# Altium PCB TEENSY 2.PcbDoc
Units mil, origin at the board's own origin, x right, y up, seen from the top; angles counter-clockwise.
Board outline 3700 x 3900 mil, 2 copper layers (Top Layer, Bottom Layer); 4 components, 15 nets, 84 pads, 0 vias.
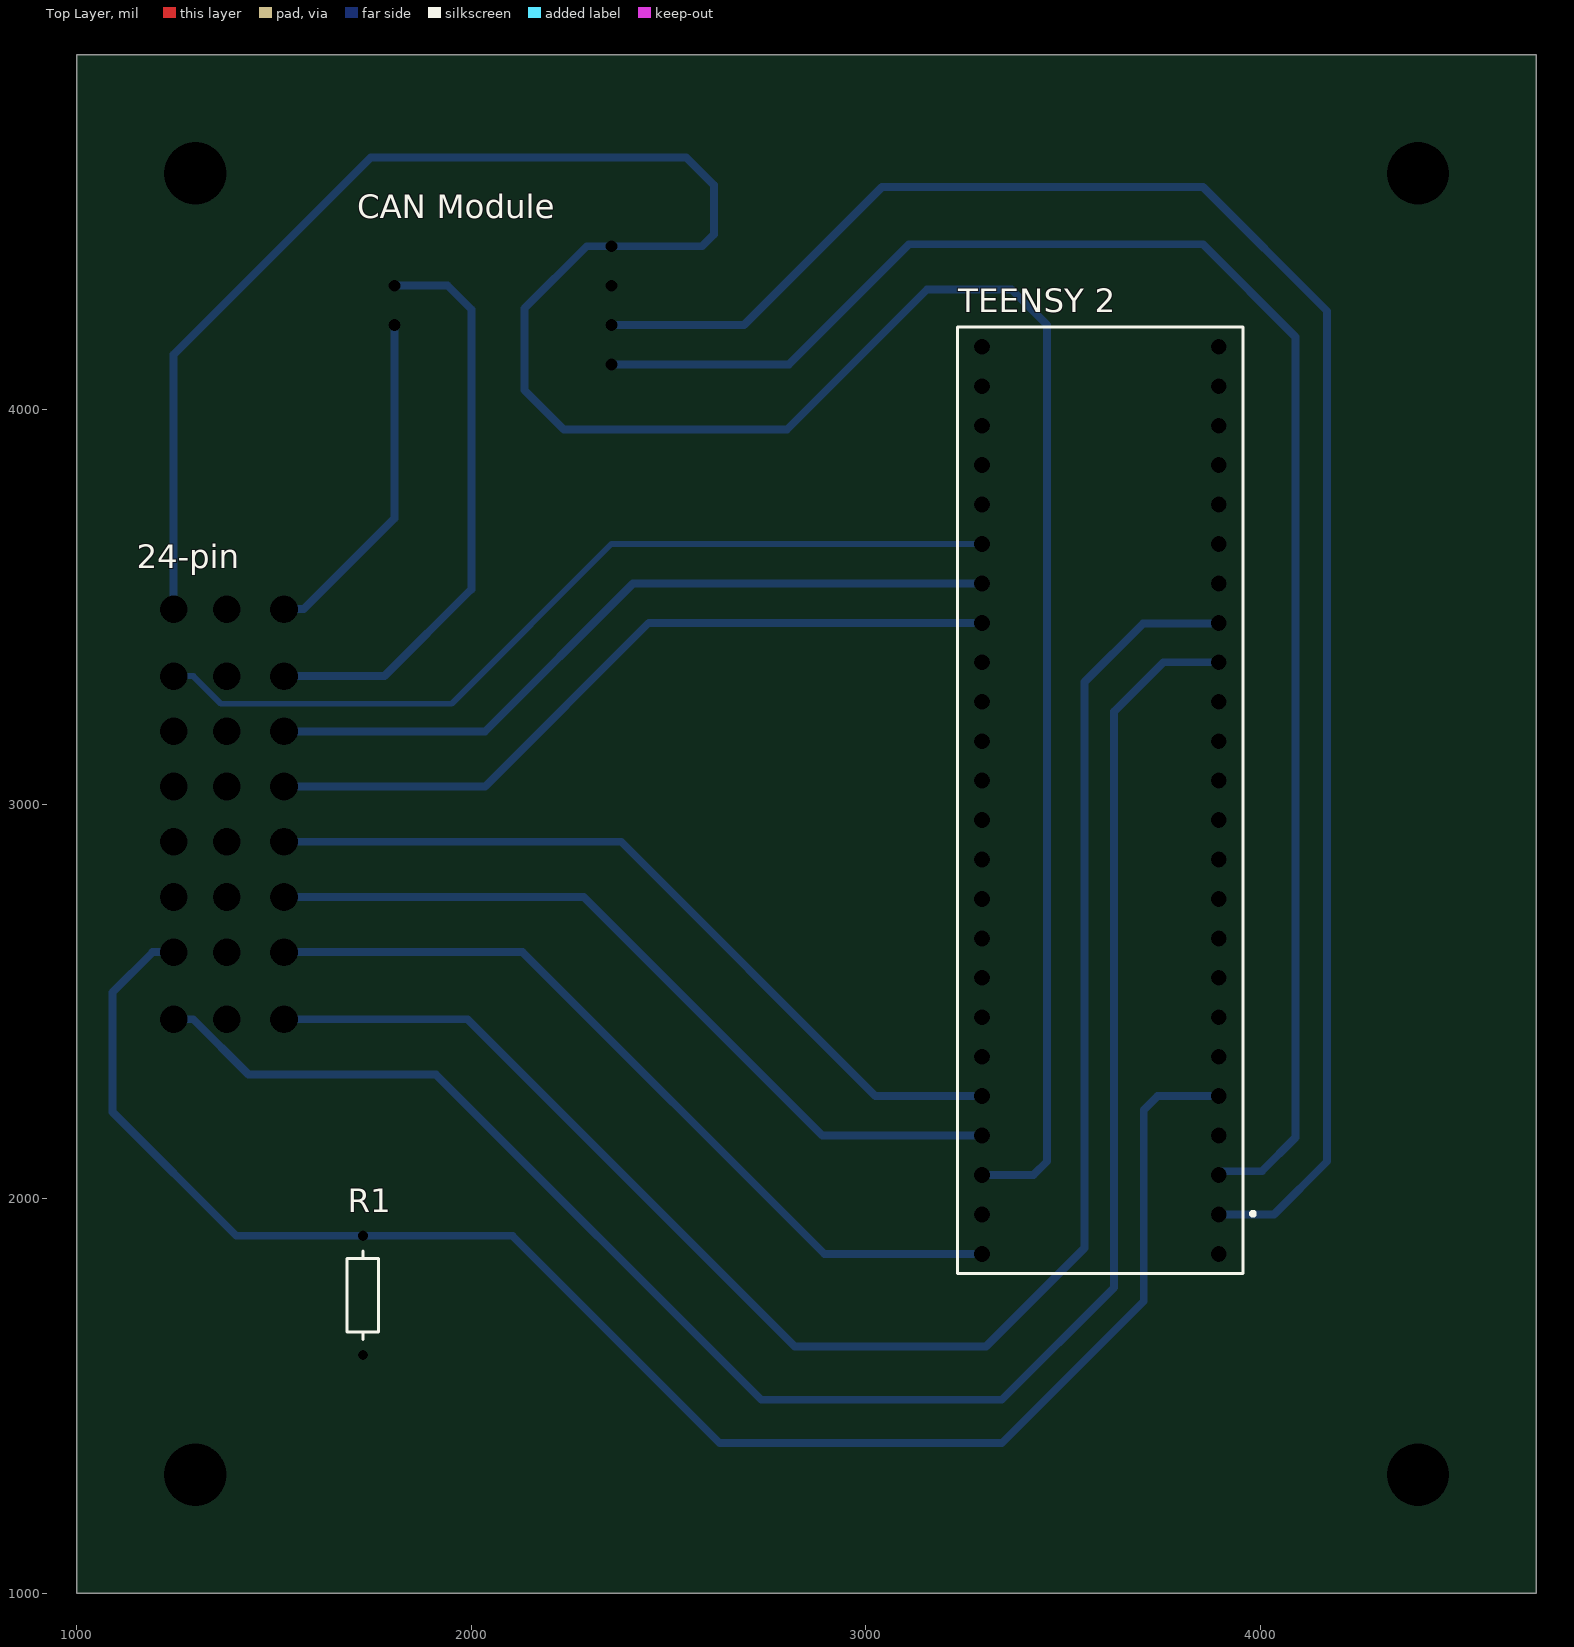
[diagram p0: Top Layer view]
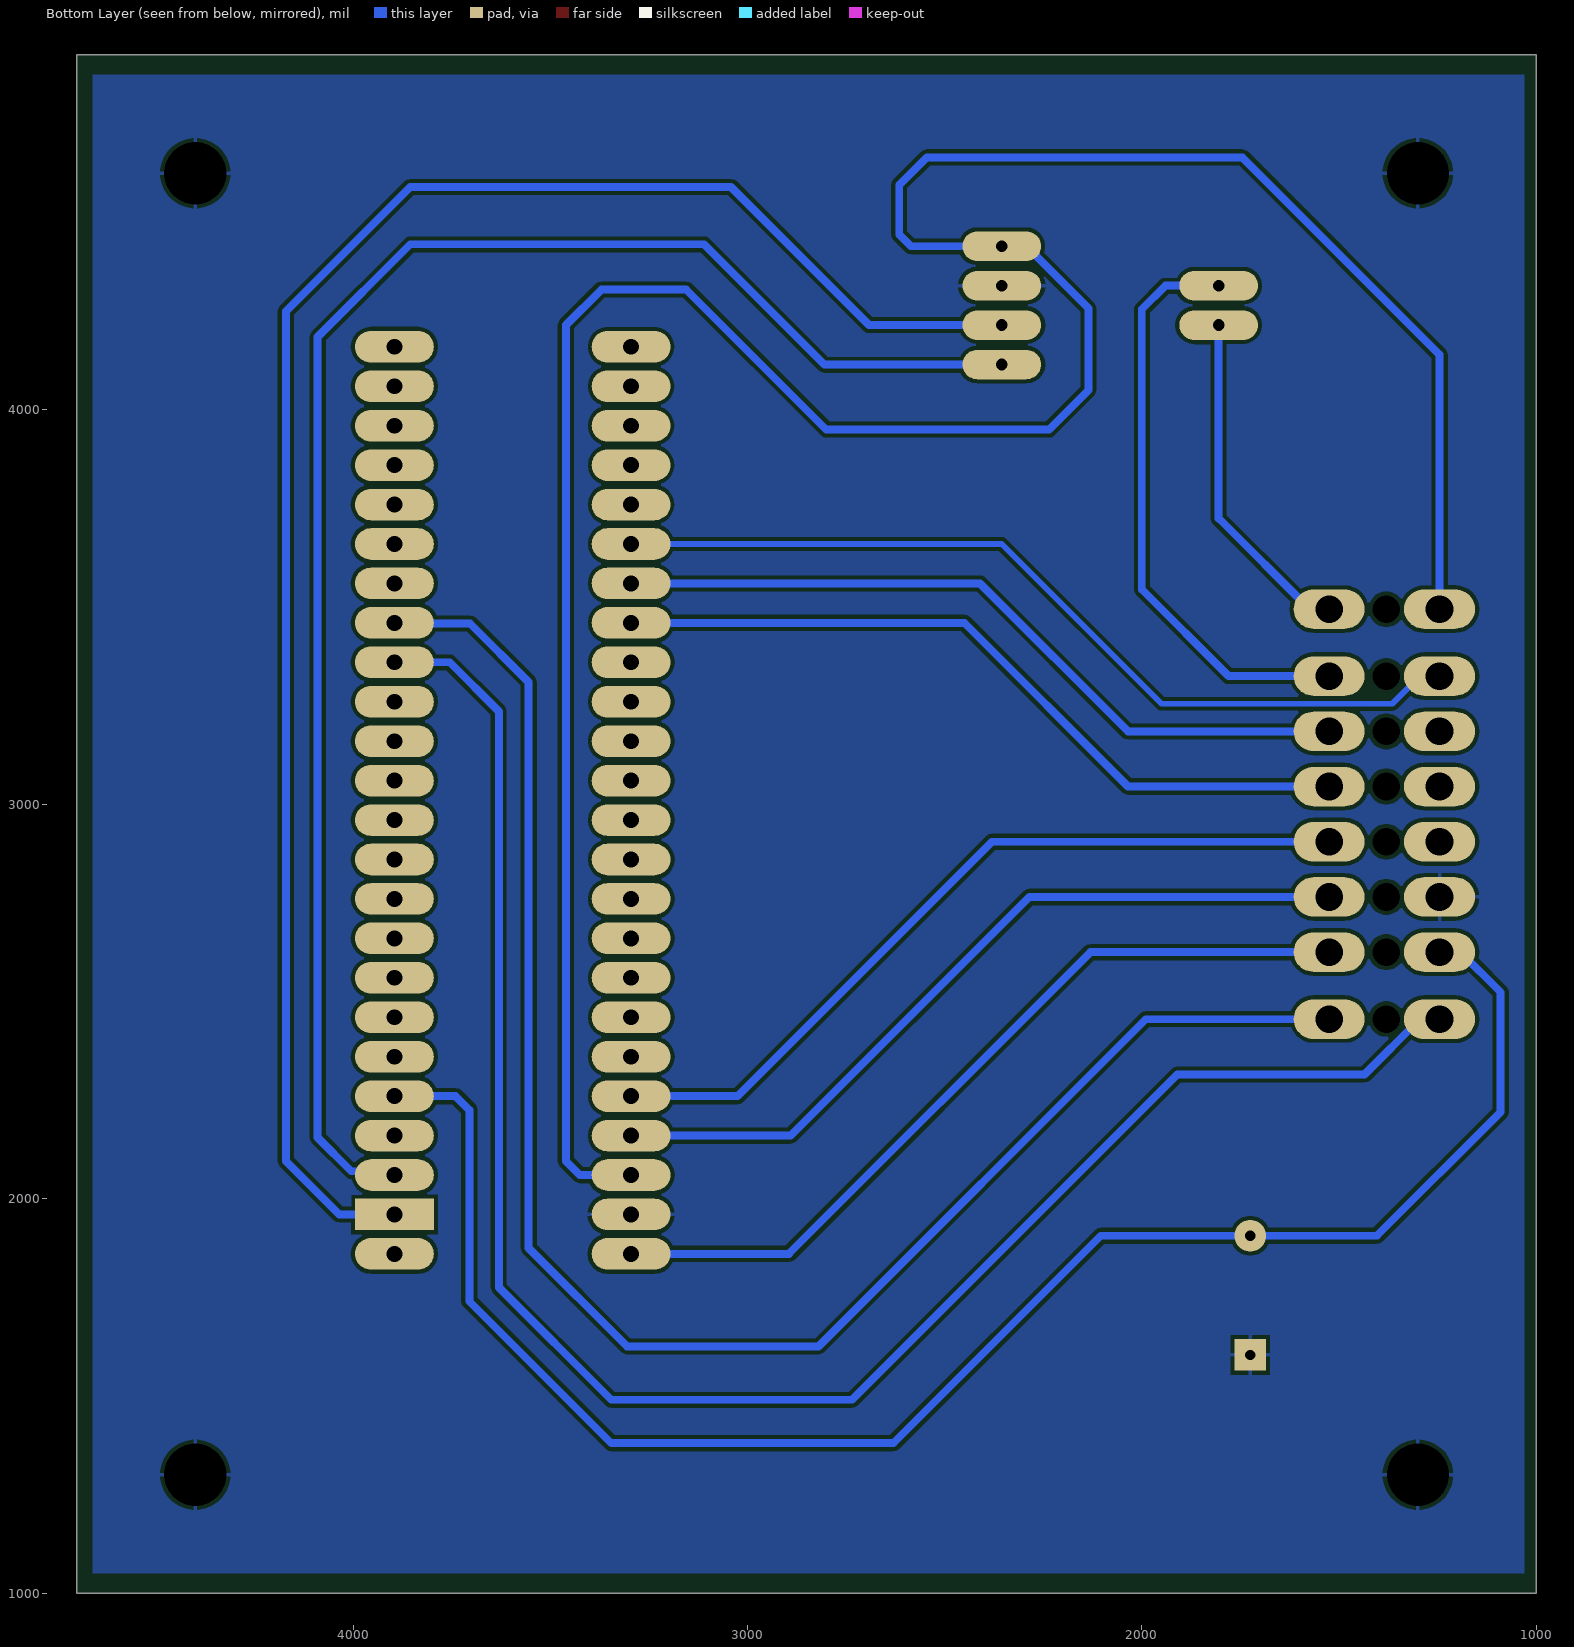
[diagram p1: Bottom Layer view, seen from below]

## Layer stack, top to bottom
Top Solder: solder mask 0.4, Solder Resist, Dk 3.5
Top Layer: signal copper 1.4
Dielectric 1: dielectric 12.6, FR-4, Dk 4.8
Bottom Layer: signal copper 1.4
Bottom Solder: solder mask 0.4, Solder Resist, Dk 3.5

## Board outline
4700,4900 4700,1000 1000,1000 1000,4900

## Design rules (kind name [scope] priority, off if disabled: settings)
Clearance [All] p1: gap=10 ignorepadtopadclearanceinfootprint=FALSE
PolygonConnect [All] p1: connectstyle=Relief reliefconductorwidth=10 reliefentries=4 polygonreliefangle="90 Angle" airgapwidth=10
RoutingVias [All] p1: holewidth=28 width=50 viastyle="Through Hole" minholewidth=28 minwidth=50 maxholewidth=28 maxwidth=50
SolderMaskExpansion [All] p1: expansion=4 istentingtop=FALSE
Width [All] p1: maxlimit=50 minlimit=15 preferedwidth=20 minimp=50.000000 maximp=50.000000 favimp=50.000000
30 further rules are at their usual default settings.

## Components (designator, comment, footprint, x,y, rotation, side; value= is the part's Value field where it differs from the comment)
24-pin "DJ7242" DJ7242-Footprint-1 1170,3495 r270 top
"CAN Module" "CAN Module" "CAN Module-Footprint-1" 2355,4415 r180 top
R1 "CMF5073K200FHEB" FP-CMF50-0 1725,1755 r90 top
"TEENSY 2" "TEENSY 4.1" FP-DEV-16996-MFG 3595,3010 r90 top

## Footprints (in the part's own frame and the unit in brackets; to place one, negate y for a bottom-side part, rotate by r counter-clockwise, add the part's x,y. Pads: shape width x height; smd on the part's side, far side on the other; paste and mask are expansions set on the pad)
"CAN Module-Footprint-1" [mil]
  round 0 / inner round 60 / far side oval 200x75 hole 30: 1(0,300) 2(0,200) 3(0,100) 4(0,0) 5(550,200) 6(550,100)
DJ7242-Footprint-1 [mil]
  round 0 / inner round 60 / far side oval 100x180 hole 70: 1(0,355) 2(170,355) 3(310,355) 4(450,355) 5(590,355) 6(730,355) 7(870,355) 8(1040,355) 17(0,75) 18(170,75) 19(310,75) 20(450,75) 21(590,75) 22(730,75) 23(870,75) 24(1040,75)
  round 0 hole 70: 9(0,210) 10(170,210) 11(310,210) 12(450,210)
  round 0 / inner oval 100x200 / far side round 0 hole 70: 13(590,210) 14(730,210) 15(870,210) 16(1040,210)
FP-CMF50-0 [mm]
  rect 0x0 / inner rect 1.15x1.15 / far side rect 2.032x2.032 hole 0.65 paste-2539.97 mask+0: 1(-3.835,0)
  round 0 / inner round 1.15 / far side round 2.032 hole 0.65 paste-2539.97 mask+0: 2(3.835,0)
  silkscreen extent -2.86,-1.01 2.86,1.01, body extent -4.51,-1.11 4.51,1.11, height 0.25
FP-DEV-16996-MFG [mm]
  rect 0x0 / inner rect 1.57x1.57 / far side rect 2.032x5.08 hole 1.02 paste-2539.97 mask+0.102: 0(-26.67,-7.62)
  round 0 / inner round 1.57 / far side oval 2.032x5.08 hole 1.02 paste-2539.97 mask+0.102: 1(-24.13,-7.62) 2(-21.59,-7.62) 3(-19.05,-7.62) 4(-16.51,-7.62) 5(-13.97,-7.62) 6(-11.43,-7.62) 7(-8.89,-7.62) 8(-6.35,-7.62) 9(-3.81,-7.62) 10(-1.27,-7.62) 11(1.27,-7.62) 12(3.81,-7.62) 13(3.81,7.62) 14(1.27,7.62) 15(-1.27,7.62) 16(-3.81,7.62) 17(-6.35,7.62) 18(-8.89,7.62) 19(-11.43,7.62) 20(-13.97,7.62) 21(-16.51,7.62) 22(-19.05,7.62) 23(-21.59,7.62) 24(8.89,-7.62) 25(11.43,-7.62) 26(13.97,-7.62) 27(16.51,-7.62) 28(19.05,-7.62) 29(21.59,-7.62) 30(24.13,-7.62) 31(26.67,-7.62) 32(29.21,-7.62) 33(29.21,7.62) 34(26.67,7.62) 35(24.13,7.62) 36(21.59,7.62) 37(19.05,7.62) 38(16.51,7.62) 39(13.97,7.62) 40(11.43,7.62) 41(8.89,7.62) 42(-29.21,7.62) 43(-26.67,7.62) 44(-24.13,7.62) 45(6.35,7.62) 46(-29.21,-7.62) 47(6.35,-7.62)
  silkscreen extent -30.48,-9.95 30.48,9.19, body extent -30.58,-9.29 30.58,9.29, height 0.25

## Part data
24-pin: library part CMP-00030-00002-5, "24-pin connector"
"CAN Module": library part CMP-00030-00003-1, "CAN waveshare"
R1: library part CMP-00030-44386654-1, "CMF5073K200FHEB Res Metal Film 73.2K Ohm 1% 0.125W(1/8W) ±50ppm/°C Epoxy AXL T/R", Case/Package=Axial, Max Operating Temperature=175°C, Max Power Dissipation=250mW, Min Operating Temperature=-55°C, Power Rating=125mW, Resistance=73.2kΩ, Temperature Coefficient=50ppm/°C, Tolerance=1%, Voltage Rating=200V, Composition="Metal Film", Diameter=1.65mm, Features="Flame Retardant Coating, Moisture Resistant", Lead Free="Lead Free", Length=3.81mm, Mount="Through Hole", NexarPartId=44386654, Number of Terminations=2, Packaging="Cut Tape", RoHS=Compliant, Schedule B="8533210090, 8533210090", Termination=Axial, Voltage Rating (DC)=200V, Width=1.65mm
"TEENSY 2": library part CMP-157412-000001-1, "TEENSY 4.1 (HEADERS)"

## Free pads (board coordinates)
  round 40 / inner round 60 / far side round 40 hole 157.48: 2(1300,4600) 3(4400,4600) 4(4400,1300) 5(1300,1300)

## Nets (pads, with @x,y where several pads share a name; then routed paths per layer and width w, separated by ;. In a path a pad name is that pad's centre, name@x,y a point inside that pad or via, vN(x,y) a via of type N, cw(c..) or ccw(c..) an arc to the next point about the centre after c; other vN are vias at no path point)
3.3V: 24-pin.17 "CAN Module.4" "TEENSY 2.44" | length 6991.5
  Bottom Layer w20: 24-pin.17 1245,4140 1745,4640 2545,4640 2615,4570 2615,4445 2585,4415 2355,4415 2292.5,4415 2135,4257.5 2135,4050 2235,3950 2800,3950 3155,4305 3370,4305 3460,4215 3460,2095 3425,2060 3295,2060
"CAN RX": "CAN Module.2" "TEENSY 2.0" | length 4576.4
  Bottom Layer w20: 2355,4215 2691.45,4215 3041.45,4565 3855,4565 4170,4250 4170,2095 4035,1960 3895,1960
"CAN TX": "CAN Module.1" "TEENSY 2.1" | length 4223
  Bottom Layer w20: 2355,4115 2805,4115 3110,4420 3855,4420 4090,4185 4090,2155 4004.5,2069.5 3904.5,2069.5 3895,2060
CANH: 24-pin.1 "CAN Module.5" | length 865.3
  Bottom Layer w20: 24-pin.1 1575,3495 1805,3725 1805,4215
CANL: 24-pin.2 "CAN Module.6" | length 1496
  Bottom Layer w20: 24-pin.2 1780,3325 2000,3545 2000,4255 1940,4315 1805,4315
"DAMP POT 3": 24-pin.6 "TEENSY 2.23" | length 2020.6
  Bottom Layer w20: 24-pin.6 2285,2765 2890,2160 3295,2160
"DAMP POT 4": 24-pin.5 "TEENSY 2.22" | length 2037.2
  Bottom Layer w20: 24-pin.5 2380,2905 3025,2260 3295,2260
GND: 24-pin.22 "CAN Module.3" "TEENSY 2.43" pad.2 pad.3 pad.4 pad.5 R1.1
SAS: 24-pin.18 "TEENSY 2.38" | length 2246.8
  Bottom Layer w15: 24-pin.18 1295,3325 1365,3255 1950,3255 2355,3660 3295,3660
SCL: 24-pin.24 "TEENSY 2.24" | length 4679.5
  Bottom Layer w20: 24-pin.24 1295,2455 1435,2315 1910,2315 2735,1490 3345,1490 3630,1775 3630,3235 3755,3360 3895,3360
SDA: 24-pin.8 "TEENSY 2.25" | length 4314.5
  Bottom Layer w20: 24-pin.8 1990,2455 2820,1625 3305,1625 3555,1875 3555,3310 3703,3458 3893,3458 3895,3460
START: 24-pin.23 "TEENSY 2.3" R1.2 | length 4301.9
  Bottom Layer w20: 24-pin.23 1191.86,2625 1090,2523.14 1090,2220 1404.02,1905.98 R1.2 2104.02,1905.98 2630,1380 3345,1380 3705,1740 3705,2225 3740,2260 3895,2260
"THR POT 1": 24-pin.3 "TEENSY 2.39" | length 1925.3
  Bottom Layer w20: 24-pin.3 2035,3185 2410,3560 3295,3560
"THR POT 2": 24-pin.4 "TEENSY 2.40" | length 1941.9
  Bottom Layer w20: 24-pin.4 2035,3045 2450,3460 3295,3460
VIN: 24-pin.7 "TEENSY 2.42" | length 2086.9
  Bottom Layer w20: 24-pin.7 2130,2625 2895,1860 3295,1860
pads on no net: 24-pin.9 24-pin.10 24-pin.11 24-pin.12 24-pin.13 24-pin.14 24-pin.15 24-pin.16 24-pin.19 24-pin.20 24-pin.21 "TEENSY 2.2" "TEENSY 2.4" "TEENSY 2.5" "TEENSY 2.6" "TEENSY 2.7" "TEENSY 2.8" "TEENSY 2.9" "TEENSY 2.10" "TEENSY 2.11" "TEENSY 2.12" "TEENSY 2.13" "TEENSY 2.14" "TEENSY 2.15" "TEENSY 2.16" "TEENSY 2.17" "TEENSY 2.18" "TEENSY 2.19" "TEENSY 2.20" "TEENSY 2.21" "TEENSY 2.26" "TEENSY 2.27" "TEENSY 2.28" "TEENSY 2.29" "TEENSY 2.30" "TEENSY 2.31" "TEENSY 2.32" "TEENSY 2.33" "TEENSY 2.34" "TEENSY 2.35" "TEENSY 2.36" "TEENSY 2.37" "TEENSY 2.41" "TEENSY 2.45" "TEENSY 2.46" "TEENSY 2.47"

## Polygon pours and split planes (outlines as drawn)
GND on Bottom Layer "GND_L02_P000" (solid, pour order 0): 1030,4850 4660,4850 4660,1050 1030,1050